# EAGLE board CT_schematic (EAGLE 7.6.0)

Size 100 x 80 mm. Coordinates in mm from the lower left corner, seen from the top.
Outline: 0,0 100,0 100,80 0,80 0,0
Copper layers (1*16): Top 0.035mm / dielectric 1.5mm / Bottom 0.035mm
Design rules "default": minimum track width 10mil, minimum drill 24mil, track to track 8mil, track to pad 8mil, pad to pad 8mil, via to via 8mil, smd to smd 8mil, copper to edge 40mil, drill to drill 8mil, minimum pad ring 10mil, minimum via ring 8mil, stop-mask expansion 4mil, vias tented up to drill 0mil, thermal gap 10mil

## Footprints (pad centres in the part's own frame; a part is rotated, then mirrored left to right if it is on the bottom)
C0603 = smd 0.8 x 0.8: 1 -0.762,0; 2 0.762,0
C0402 = smd 0.5 x 0.5: 1 -0.508,0; 2 0.508,0
C0805 = smd 1.2 x 1.3: 1 -1.016,0; 2 1.016,0
C1210 = smd 1.2 x 2.5: 1 -1.524,0; 2 1.524,0
EXV-9H = smd 3.505 x 1.676: 1 -2.857,0; 2 2.857,0
L0603 = smd 0.8 x 0.8: 1 -0.762,0; 2 0.762,0
R0603 = smd 0.8 x 0.8: 1 -0.762,0; 2 0.762,0
PJ-037B_PACKAGE = drill 3.7 square: 1 12,0 | drill 3.2 square: 2 6,0
LQFP176 = smd 0.3 x 1.2: 1 -10.75,-12.75; 2 -10.25,-12.75; 3 -9.75,-12.75; 4 -9.25,-12.75; 5 -8.75,-12.75; 6 -8.25,-12.75; 7 -7.75,-12.75; 8 -7.25,-12.75; 9 -6.75,-12.75; 10 -6.25,-12.75; 11 -5.75,-12.75; 12 -5.25,-12.75; 13 -4.75,-12.75; 14 -4.25,-12.75; 15 -3.75,-12.75; 16 -3.25,-12.75; 17 -2.75,-12.75; 18 -2.25,-12.75; 19 -1.75,-12.75; 20 -1.25,-12.75; 21 -0.75,-12.75; 22 -0.25,-12.75; 23 0.25,-12.75; 24 0.75,-12.75; 25 1.25,-12.75; 26 1.75,-12.75; 27 2.25,-12.75; 28 2.75,-12.75; 29 3.25,-12.75; 30 3.75,-12.75; 31 4.25,-12.75; 32 4.75,-12.75; 33 5.25,-12.75; 34 5.75,-12.75; 35 6.25,-12.75; 36 6.75,-12.75; 37 7.25,-12.75; 38 7.75,-12.75; 39 8.25,-12.75; 40 8.75,-12.75; 41 9.25,-12.75; 42 9.75,-12.75; 43 10.25,-12.75; 44 10.75,-12.75; 89 10.75,12.75; 90 10.25,12.75; 91 9.75,12.75; 92 9.25,12.75; 93 8.75,12.75; 94 8.25,12.75; 95 7.75,12.75; 96 7.25,12.75; 97 6.75,12.75; 98 6.25,12.75; 99 5.75,12.75; 100 5.25,12.75; 101 4.75,12.75; 102 4.25,12.75; 103 3.75,12.75; 104 3.25,12.75; 105 2.75,12.75; 106 2.25,12.75; 107 1.75,12.75; 108 1.25,12.75; 109 0.75,12.75; 110 0.25,12.75; 111 -0.25,12.75; 112 -0.75,12.75; 113 -1.25,12.75; 114 -1.75,12.75; 115 -2.25,12.75; 116 -2.75,12.75; 117 -3.25,12.75; 118 -3.75,12.75; 119 -4.25,12.75; 120 -4.75,12.75; 121 -5.25,12.75; 122 -5.75,12.75; 123 -6.25,12.75; 124 -6.75,12.75; 125 -7.25,12.75; 126 -7.75,12.75; 127 -8.25,12.75; 128 -8.75,12.75; 129 -9.25,12.75; 130 -9.75,12.75; 131 -10.25,12.75; 132 -10.75,12.75 | smd 1.2 x 0.3: 45 12.75,-10.75; 46 12.75,-10.25; 47 12.75,-9.75; 48 12.75,-9.25; 49 12.75,-8.75; 50 12.75,-8.25; 51 12.75,-7.75; 52 12.75,-7.25; 53 12.75,-6.75; 54 12.75,-6.25; 55 12.75,-5.75; 56 12.75,-5.25; 57 12.75,-4.75; 58 12.75,-4.25; 59 12.75,-3.75; 60 12.75,-3.25; 61 12.75,-2.75; 62 12.75,-2.25; 63 12.75,-1.75; 64 12.75,-1.25; 65 12.75,-0.75; 66 12.75,-0.25; 67 12.75,0.25; 68 12.75,0.75; 69 12.75,1.25; 70 12.75,1.75; 71 12.75,2.25; 72 12.75,2.75; 73 12.75,3.25; 74 12.75,3.75; 75 12.75,4.25; 76 12.75,4.75; 77 12.75,5.25; 78 12.75,5.75; 79 12.75,6.25; 80 12.75,6.75; 81 12.75,7.25; 82 12.75,7.75; 83 12.75,8.25; 84 12.75,8.75; 85 12.75,9.25; 86 12.75,9.75; 87 12.75,10.25; 88 12.75,10.75; 133 -12.75,10.75; 134 -12.75,10.25; 135 -12.75,9.75; 136 -12.75,9.25; 137 -12.75,8.75; 138 -12.75,8.25; 139 -12.75,7.75; 140 -12.75,7.25; 141 -12.75,6.75; 142 -12.75,6.25; 143 -12.75,5.75; 144 -12.75,5.25; 145 -12.75,4.75; 146 -12.75,4.25; 147 -12.75,3.75; 148 -12.75,3.25; 149 -12.75,2.75; 150 -12.75,2.25; 151 -12.75,1.75; 152 -12.75,1.25; 153 -12.75,0.75; 154 -12.75,0.25; 155 -12.75,-0.25; 156 -12.75,-0.75; 157 -12.75,-1.25; 158 -12.75,-1.75; 159 -12.75,-2.25; 160 -12.75,-2.75; 161 -12.75,-3.25; 162 -12.75,-3.75; 163 -12.75,-4.25; 164 -12.75,-4.75; 165 -12.75,-5.25; 166 -12.75,-5.75; 167 -12.75,-6.25; 168 -12.75,-6.75; 169 -12.75,-7.25; 170 -12.75,-7.75; 171 -12.75,-8.25; 172 -12.75,-8.75; 173 -12.75,-9.25; 174 -12.75,-9.75; 175 -12.75,-10.25; 176 -12.75,-10.75
TST-110-05-T-D-RA = drill 1 pad 1.7 square: 1 0,0 | drill 1 pad 1.7: 2 0,2.54; 3 2.54,0; 4 2.54,2.54; 5 5.08,0; 6 5.08,2.54; 7 7.62,0; 8 7.62,2.54; 9 10.16,0; 10 10.16,2.54; 11 12.7,0; 12 12.7,2.54; 13 15.24,0; 14 15.24,2.54; 15 17.78,0; 16 17.78,2.54; 17 20.32,0; 18 20.32,2.54; 19 22.86,0; 20 22.86,2.54
QFN-32 = smd 0.6 x 0.3: 1 -2.3,1.75; 2 -2.3,1.25; 3 -2.3,0.75; 4 -2.3,0.25; 5 -2.3,-0.25; 6 -2.3,-0.75; 7 -2.3,-1.25; 8 -2.3,-1.75; 17 2.3,-1.75; 18 2.3,-1.25; 19 2.3,-0.75; 20 2.3,-0.25; 21 2.3,0.25; 22 2.3,0.75; 23 2.3,1.25; 24 2.3,1.75 | smd 0.3 x 0.6: 9 -1.75,-2.3; 10 -1.25,-2.3; 11 -0.75,-2.3; 12 -0.25,-2.3; 13 0.25,-2.3; 14 0.75,-2.3; 15 1.25,-2.3; 16 1.75,-2.3; 25 1.75,2.3; 26 1.25,2.3; 27 0.75,2.3; 28 0.25,2.3; 29 -0.25,2.3; 30 -0.75,2.3; 31 -1.25,2.3; 32 -1.75,2.3 | smd 3.2 x 3.2: EXP 0,0
7498011122R = smd 0.71 x 2.29: 1 -3.545,-3.18; 2 -2.525,-3.18; 3 -1.505,-3.18; 4 -0.485,-3.18; 5 0.535,-3.18; 6 1.555,-3.18; 8 3.595,-3.18; 9 5.635,-3.18; 10 6.655,-3.18; 11 -6.605,-3.18; 12 -5.585,-3.18 | smd 1.4 x 2.54: 13 -8.51,10.2; 14 8.51,10.2 | hole 1.4: -3.5,0; 3.5,0
TDFN-8/6MM = smd 0.3 x 0.75: 1 0,0; 2 0.5,0; 3 1,0; 4 1.5,0; 5 1.5,3; 6 1,3; 7 0.5,3; 8 0,3
SOIC-8 = smd 1.6 x 0.6: 1 -2.7,1.905 | smd 1.55 x 0.6: 2 -2.7,0.635; 3 -2.7,-0.635; 4 -2.7,-1.905; 5 2.7,-1.905; 6 2.7,-0.635; 7 2.7,0.635; 8 2.7,1.905
182-009-MALE = drill 1.194 pad 1.524 octagon: 1 -5.537,10.923; 2 -2.769,10.923; 3 0,10.923; 4 2.769,10.923; 5 5.537,10.923; 6 -4.153,8.08; 7 -1.384,8.08; 8 1.384,8.08; 9 4.153,8.08 | hole 3.048: -12.446,9.501; 12.446,9.501
FCI_10118193-0001LF = smd 0.4 x 1.35: 1 -1.3,2.675; 2 -0.65,2.675; 3 0,2.675; 4 0.65,2.675; 5 1.3,2.675 | smd 1.6 x 1.4: 6 -3.2,2.45; 7 3.2,2.45 | smd 1.9 x 1.9: 8 -1.2,0; 9 1.2,0 | hole 0.5: -3.3,0; 3.3,0
SOT143B = smd 1 x 0.7: 1 -0.75,-1 | smd 0.6 x 0.7: 2 0.95,-1; 3 0.95,1; 4 -0.95,1
QFN-28 = smd 0.813 x 0.305: 1 -2.451,1.5; 2 -2.451,1; 3 -2.451,0.5; 4 -2.451,0; 5 -2.451,-0.5; 6 -2.451,-1; 7 -2.451,-1.5; 15 2.451,-1.5; 16 2.451,-1; 17 2.451,-0.5; 18 2.451,0; 19 2.451,0.5; 20 2.451,1; 21 2.451,1.5 | smd 0.305 x 0.813: 8 -1.5,-2.451; 9 -1,-2.451; 10 -0.5,-2.451; 11 0,-2.451; 12 0.5,-2.451; 13 1,-2.451; 14 1.5,-2.451; 22 1.5,2.451; 23 1,2.451; 24 0.5,2.451; 25 0,2.451; 26 -0.5,2.451; 27 -1,2.451; 28 -1.5,2.451 | smd 3.607 x 3.607: 29 0,0
SJ-43515TS-SMT-TR = smd 2.2 x 3: 1 0.6,-7.4; 4 3.4,-7.4 | smd 3 x 3: 2 12.8,-7.4; 5 17,-3 | smd 2 x 3: 3 5.3,0; 6 2.5,0 | drill 1.8: P$7 4.5,-3.69; P$8 11.54,-3.69
ABS07-32.768KHZ-7-T = smd 1.1 x 2.4: 1 -2.5,0; 2 0,0
ABLS-25.000MHZ-B2F-T = smd 5.6 x 2.8: 1 -3.81,0; 2 5.69,0
ABLS-12.288MHZ-B4-T = smd 5.6 x 2.8: 1 -3.81,0; 2 5.69,0
ASFL1 = smd 1.7 x 1.5: 1 -1.27,-1.1; 2 1.27,-1.1; 3 1.27,1.1; 4 -1.27,1.1
WSON-8 = smd 0.3 x 0.6: 1 -0.75,0; 2 0.05,0; 3 0.85,0; 4 1.65,0; 5 1.65,3.8; 6 0.85,3.8; 7 0.05,3.8; 8 -0.75,3.8 | smd 3 x 2.6: PAD 0.45,1.9
SON-6 = smd 0.55 x 0.3: 1 -0.355,0.5 | smd 0.52 x 0.3: 2 -0.37,0; 3 -0.37,-0.5; 4 0.37,-0.5; 5 0.37,0; 6 0.37,0.5
SW_4-1437565-2 = smd 1.4 x 2.1: 1 -2.23,4.55; 2 -2.23,-4.55; 3 2.23,4.55; 4 2.23,-4.55
LGM67K-G1J2-24-Z = smd 0.8 x 1.4: A -2,0; C 0,0
NC7SZ125M5X = smd 1.3 x 0.7: 1 -1.3,0.95; 2 -1.3,0; 3 -1.3,-0.95; 4 1.3,-0.95; 5 1.3,0.95

## Placement (x,y rotation side)
C1  1e-06  [C0603]  -22.86,87.63 0 top  (outside the outline)
C2  1e-07  [C0603]  -26.67,87.63 0 top  (outside the outline)
C3  1e-07  [C0603]  -30.48,87.63 0 top  (outside the outline)
C4  1e-07  [C0603]  -34.29,87.63 0 top  (outside the outline)
C5  1e-07  [C0603]  -38.1,87.63 0 top  (outside the outline)
C6  1e-07  [C0603]  -41.91,87.63 0 top  (outside the outline)
C7  1e-07  [C0603]  -45.72,87.63 0 top  (outside the outline)
C8  1e-07  [C0603]  -49.53,87.63 0 top  (outside the outline)
C9  1e-07  [C0603]  -53.34,87.63 0 top  (outside the outline)
C10  1e-07  [C0603]  -57.15,87.63 0 top  (outside the outline)
C11  1e-07  [C0603]  -60.96,87.63 0 top  (outside the outline)
C12  1e-07  [C0603]  -64.77,87.63 0 top  (outside the outline)
C13  1e-07  [C0603]  -68.58,87.63 0 top  (outside the outline)
C14  1e-07  [C0603]  -72.39,87.63 0 top  (outside the outline)
C15  1e-07  [C0603]  -76.2,87.63 0 top  (outside the outline)
C16  1e-07  [C0603]  -80.01,87.63 0 top  (outside the outline)
C17  1e-07  [C0603]  -83.82,87.63 0 top  (outside the outline)
C18  4.7e-06  [C0603]  -95.25,82.55 0 top  (outside the outline)
C19  1e-08  [C0603]  -87.63,87.63 0 top  (outside the outline)
C20  1e-06  [C0603]  -91.44,87.63 0 top  (outside the outline)
C21  2.2e-06  [C0603]  -99.06,82.55 0 top  (outside the outline)
C22  2.2e-06  [C0603]  -15.24,87.63 0 top  (outside the outline)
C23  1e-11  [C0402]  -50.8,97.79 0 top  (outside the outline)
C24  1e-11  [C0402]  -54.61,97.79 0 top  (outside the outline)
C25  1e-06  [C0603]  -95.25,87.63 0 top  (outside the outline)
C26  1e-07  [C0402]  -58.42,97.79 0 top  (outside the outline)
C27  1e-07  [C0402]  -62.23,97.79 0 top  (outside the outline)
C28  1e-07  [C0402]  -66.04,97.79 0 top  (outside the outline)
C29  2.2e-06  [C0603]  -19.05,87.63 0 top  (outside the outline)
C30  1e-07  [C0402]  -69.85,97.79 0 top  (outside the outline)
C31  1e-07  [C0402]  -73.66,97.79 0 top  (outside the outline)
C32  1e-05  [C0805]  -81.28,74.93 0 top  (outside the outline)
C33  1e-07  [C0402]  -77.47,97.79 0 top  (outside the outline)
C34  2.2e-11  [C0402]  -35.56,97.79 0 top  (outside the outline)
C35  2.2e-11  [C0402]  -39.37,97.79 0 top  (outside the outline)
C36  1e-08  [C0402]  -81.28,97.79 0 top  (outside the outline)
C37  1e-07  [C0402]  -85.09,97.79 0 top  (outside the outline)
C38  2.2e-05  [C1210]  -38.1,76.2 0 top  (outside the outline)
C39  2.2e-05  [C1210]  -44.45,76.2 0 top  (outside the outline)
C40  1e-09  [C0402]  -88.9,97.79 0 top  (outside the outline)
C41  1e-09  [C0402]  -92.71,97.79 0 top  (outside the outline)
C42  1e-07  [C0402]  -96.52,97.79 0 top  (outside the outline)
C43  1e-07  [C0402]  -15.24,102.87 0 top  (outside the outline)
C44  1e-07  [C0402]  -19.05,102.87 0 top  (outside the outline)
C45  1e-07  [C0402]  -22.86,102.87 0 top  (outside the outline)
C46  1e-07  [C0402]  -26.67,102.87 0 top  (outside the outline)
C47  1e-05  [C0805]  -86.36,74.93 0 top  (outside the outline)
C48  1e-05  [C0805]  -91.44,74.93 0 top  (outside the outline)
C49  1e-05  [C0805]  -96.52,74.93 0 top  (outside the outline)
C50  1e-05  [C0805]  -15.24,82.55 0 top  (outside the outline)
C51  1e-05  [C0805]  -20.32,82.55 0 top  (outside the outline)
C52  2.2e-11  [C0402]  -43.18,97.79 0 top  (outside the outline)
C53  2.2e-11  [C0402]  -46.99,97.79 0 top  (outside the outline)
C54  1e-08  [C0402]  -30.48,102.87 0 top  (outside the outline)
C55  1e-08  [C0402]  -34.29,102.87 0 top  (outside the outline)
C56  1e-08  [C0402]  -38.1,102.87 0 top  (outside the outline)
C57  1e-05  [C1210]  -50.8,76.2 0 top  (outside the outline)
C58  1e-05  [C1210]  -57.15,76.2 0 top  (outside the outline)
C59  1e-07  [C0402]  -41.91,102.87 0 top  (outside the outline)
C60  0.0001  [EXV-9H]  -17.78,68.58 0 top  (outside the outline)
C61  0.0001  [EXV-9H]  -29.21,68.58 0 top  (outside the outline)
C62  1e-08  [C0402]  -45.72,102.87 0 top  (outside the outline)
C63  1e-08  [C0402]  -49.53,102.87 0 top  (outside the outline)
C64  1e-08  [C0402]  -53.34,102.87 0 top  (outside the outline)
F1  240.0  [L0603]  -99.06,87.63 0 top  (outside the outline)
I1  97.0  [R0603]  -15.24,92.71 0 top  (outside the outline)
J1  PJ-037B  [PJ-037B_PACKAGE]  -83.82,35.56 0 top  (outside the outline)
R2  1000.0  [R0603]  -19.05,92.71 0 top  (outside the outline)
R7  4700.0  [R0603]  -22.86,92.71 0 top  (outside the outline)
R8  4700.0  [R0603]  -26.67,92.71 0 top  (outside the outline)
R9  2200.0  [R0603]  -30.48,92.71 0 top  (outside the outline)
R11  2200.0  [R0603]  -34.29,92.71 0 top  (outside the outline)
R13  2200.0  [R0603]  -38.1,92.71 0 top  (outside the outline)
R15  2200.0  [R0603]  -41.91,92.71 0 top  (outside the outline)
R17  10000.0  [R0603]  -45.72,82.55 0 top  (outside the outline)
R18  10000.0  [R0603]  -50.8,82.55 0 top  (outside the outline)
R19  10000.0  [R0603]  -55.88,82.55 0 top  (outside the outline)
R20  10000.0  [R0603]  -60.96,82.55 0 top  (outside the outline)
R21  10000.0  [R0603]  -66.04,82.55 0 top  (outside the outline)
R22  0.1  [R0603]  -45.72,92.71 0 top  (outside the outline)
R23  0.1  [R0603]  -49.53,92.71 0 top  (outside the outline)
R24  200.0  [R0603]  -53.34,92.71 0 top  (outside the outline)
R25  220.0  [R0603]  -57.15,92.71 0 top  (outside the outline)
R26  6490.0  [R0603]  -60.96,92.71 0 top  (outside the outline)
R27  4700.0  [R0603]  -64.77,92.71 0 top  (outside the outline)
R28  4700.0  [R0603]  -68.58,92.71 0 top  (outside the outline)
R29  4700.0  [R0603]  -72.39,92.71 0 top  (outside the outline)
R30  4700.0  [R0603]  -76.2,92.71 0 top  (outside the outline)
R31  1000.0  [R0603]  -80.01,92.71 0 top  (outside the outline)
R32  4700.0  [R0603]  -83.82,92.71 0 top  (outside the outline)
R33  1000.0  [R0603]  -87.63,92.71 0 top  (outside the outline)
R34  1000.0  [R0603]  -91.44,92.71 0 top  (outside the outline)
R35  1000.0  [R0603]  -95.25,92.71 0 top  (outside the outline)
R36  4700.0  [R0603]  -99.06,92.71 0 top  (outside the outline)
R37  120.0  [R0603]  -15.24,97.79 0 top  (outside the outline)
R38  470000.0  [R0603]  -25.4,82.55 0 top  (outside the outline)
R39  47000.0  [R0603]  -71.12,82.55 0 top  (outside the outline)
R40  47000.0  [R0603]  -76.2,82.55 0 top  (outside the outline)
R41  47000.0  [R0603]  -81.28,82.55 0 top  (outside the outline)
R42  680.0  [R0603]  -19.05,97.79 0 top  (outside the outline)
R43  100000.0  [R0603]  -30.48,82.55 0 top  (outside the outline)
R44  2231.0  [R0603]  -22.86,97.79 0 top  (outside the outline)
R45  1000.0  [R0603]  -26.67,97.79 0 top  (outside the outline)
R46  10000.0  [R0603]  -86.36,82.55 0 top  (outside the outline)
R47  10000.0  [R0603]  -91.44,82.55 0 top  (outside the outline)
R48  9100.0  [R0603]  -30.48,97.79 0 top  (outside the outline)
R49  680000.0  [R0603]  -35.56,82.55 0 top  (outside the outline)
R50  120000.0  [R0603]  -40.64,82.55 0 top  (outside the outline)
U1  STM32F437IIT6  [LQFP176]  -45.72,13.97 0 top  (outside the outline)
U2  TST-110-05-T-D-RA  [TST-110-05-T-D-RA]  -91.44,57.15 0 top  (outside the outline)
U3  KSZ8081RNBIA-TR  [QFN-32]  -44.45,48.26 0 top  (outside the outline)
U4  7498011122R  [7498011122R]  -22.86,7.62 0 top  (outside the outline)
U5  24AA08T-I/MNY  [TDFN-8/6MM]  -60.96,46.99 0 top  (outside the outline)
U6  SN65HVD230D  [SOIC-8]  -73.66,48.26 0 top  (outside the outline)
U7  182-009-113R531  [182-009-MALE]  -82.55,6.35 0 top  (outside the outline)
U8  10118193-0001LF  [FCI_10118193-0001LF]  -52.07,59.69 0 top  (outside the outline)
U9  prtr5v0u2ax  [SOT143B]  -66.04,102.87 0 top  (outside the outline)
U10  WM8731CLSEFL  [QFN-28]  -30.48,76.2 0 top  (outside the outline)
U11  SJ-43515TS-SMT-TR  [SJ-43515TS-SMT-TR]  -39.37,38.1 0 top  (outside the outline)
U12  SJ-43515TS-SMT-TR  [SJ-43515TS-SMT-TR]  -67.31,38.1 0 top  (outside the outline)
U13  ABS07-32.768KHZ-7-T  [ABS07-32.768KHZ-7-T]  -91.44,68.58 0 top  (outside the outline)
U14  ABLS-25.000MHZ-B2F-T  [ABLS-25.000MHZ-B2F-T]  -48.26,68.58 0 top  (outside the outline)
U15  ABLS-12.288MHZ-B4-T  [ABLS-12.288MHZ-B4-T]  -68.58,68.58 0 top  (outside the outline)
U16  ASFL1-25MHZ-NCS  [ASFL1]  -26.67,59.69 0 top  (outside the outline)
U17  ASFL1-50MHZ-NCS  [ASFL1]  -43.18,59.69 0 top  (outside the outline)
U18  LP3878SDX-ADJ/NOPB  [WSON-8]  -95.25,45.72 0 top  (outside the outline)
U19  TPS3895ADRYR  [SON-6]  -69.85,101.6 0 top  (outside the outline)
U20  4-1437565-2  [SW_4-1437565-2]  -27.94,49.53 0 top  (outside the outline)
U21  Q65110A2395  [LGM67K-G1J2-24-Z]  -17.78,76.2 0 top  (outside the outline)
U22  nc7sz125m5x  [NC7SZ125M5X]  -62.23,74.93 0 top  (outside the outline)
U23  nc7sz125m5x  [NC7SZ125M5X]  -68.58,74.93 0 top  (outside the outline)
U24  nc7sz125m5x  [NC7SZ125M5X]  -74.93,74.93 0 top  (outside the outline)

## Library data of the parts
C1-C64 F1 I1 J1 R2 R7-R9 R11 R13 R15 R17-R50 U1-U24 = circuit_tree

## Nets
CLK_CRYSTAL_U1_9: C23.1 U1.9 U13.1
CLK_CRYSTAL_U1_10: C24.1 U1.10 U13.2
CLK_CRYSTAL_U3_8: C34.1 U3.8 U14.2
CLK_CRYSTAL_U3_9: C35.1 U3.9 U14.1
CLK_CRYSTAL_U10_1: C52.1 U10.1 U15.1
CLK_CRYSTAL_U10_2: C53.1 U10.2 U15.2
CLK_U1_29: U1.29 U16.3
CLK_U1_41: U1.41 U17.3
GND: C1.2 C2.2 C3.2 C4.2 C5.2 C6.2 C7.2 C8.2 C9.2 C10.2 C11.2 C12.2 C13.2 C14.2 C15.2 C16.2 C17.2 C18.2 C19.2 C20.2 C21.2 C22.2 C23.2 C24.2 C25.2 C26.2 C27.2 C28.2 C29.2 C30.2 C31.2 C32.2 C33.2 C34.2 C35.2 C36.2 C37.2 C41.2 C42.2 C43.2 C44.2 C45.2 C46.2 C47.2 C48.2 C49.2 C50.2 C51.2 C52.2 C53.2 C54.2 C55.2 C56.2 C57.2 C58.2 C59.2 C60.2 C61.2 C62.2 C63.2 C64.2 J1.2 R2.2 R20.2 R22.2 R23.2 R26.2 R28.2 R31.2 R33.2 R34.2 R35.2 R38.2 R39.2 R40.2 R41.2 R45.2 R48.2 R50.2 U1.14 U1.22 U1.37 U1.61 U1.71 U1.90 U1.102 U1.113 U1.122 U1.126 U1.135 U1.148 U1.158 U2.4 U2.6 U2.8 U2.10 U2.12 U2.14 U2.16 U2.18 U2.20 U3.1 U3.EXP U4.1 U4.10 U5.4 U5.7 U6.2 U7.5 U8.5 U8.6 U8.7 U8.8 U8.9 U9.1 U10.4 U10.15 U10.19 U10.25 U10.26 U10.29 U11.1 U12.1 U16.2 U17.2 U18.3 U18.PAD U19.2 U21.C U22.2 U22.3 U23.1 U23.3 U24.1 U24.3
NET_U1_31: R8.1 U1.31 U24.4
NET_U1_33: R13.1 U1.33 U3.12
NET_U1_39: C19.1 C20.1 F1.1 U1.38 U1.39
NET_U1_42: R15.1 U1.42 U3.11
NET_U1_48: R20.1 U1.48
NET_U1_58: R19.1 U1.58
NET_U1_81: C21.1 U1.81
NET_U1_125: C22.1 U1.125
NET_U1_164: R9.1 U1.164 U5.6
NET_U1_165: R11.1 U1.165 U5.5
NET_U1_166: R18.1 U1.166
NET_U1_171: R17.1 U1.171
NET_U1_175: U21.A
NET_U1_176: U20.3 U20.4
NET_U3_2: C29.1 C30.1 U3.2
NET_U3_3: C31.1 I1.1 U3.3
NET_U3_10: R26.1 U3.10
NET_U3_13: R29.1 U3.13
NET_U3_14: R30.1 U3.14
NET_U3_19: R28.1 U3.19
NET_U3_20: R34.1 U3.20
NET_U3_21: R27.1 U3.21
NET_U3_28: R32.1 U3.28
NET_U3_29: R33.1 U3.29
NET_U3_31: R35.1 U3.31
NET_U3_32: R7.1 U3.32 U23.4
NET_U4_1: U3.7 U4.1
NET_U4_2: C27.1 U4.2
NET_U4_3: U3.6 U4.3
NET_U4_4: U3.5 U4.4
NET_U4_5: C28.1 U4.5
NET_U4_6: U3.4 U4.6
NET_U4_8: R23.1 U4.8
NET_U4_9: R24.1 U4.9
NET_U4_12: R25.1 U4.12
NET_U4_13: R22.1 U4.13 U4.14
NET_U4_30: R24.2
NET_U4_31: R25.2
NET_U6_6: R37.2 U6.6
NET_U6_8: R38.1 U6.8
NET_U7_2: R37.2 U6.6 U7.2
NET_U7_3: R37.1 U6.7 U7.3
NET_U10_9: U10.9
NET_U10_20: C46.1 C51.1 U10.20
NET_U11_2: C39.1 R40.1 U11.2
NET_U11_5: C38.1 R39.1 U11.5
NET_U11_13: C38.2
NET_U11_14: C39.2
NET_U12_5: C40.1 C41.1 R41.1 R42.1 U12.5
NET_U12_21: R42.2
NET_U12_22: C40.2
NET_U18_1: C56.1 U18.1
NET_U18_6: R44.2 R45.1 U18.6
NET_U18_8: R43.1 U18.8
NET_U19_1: R47.1 R48.1 U19.1
NET_U19_3: R49.2 R50.1 U19.3
NET_U19_4: R46.1 U19.4 U22.4 U23.2 U24.2
NET_U20_1: R2.1 U20.1 U20.2
PROC_CAN1_RX: U1.11 U6.4
PROC_CAN1_TX: U1.128 U6.1
PROC_ETH_CRS_DV: U1.53 U3.18
PROC_ETH_RXD0: R36.1 U1.54 U3.16
PROC_ETH_RXD1: R31.1 U1.55 U3.15
PROC_ETH_TX_EN: U1.80 U3.23
PROC_ETH_TXD0: U1.92 U3.24
PROC_ETH_TXD1: U1.93 U3.25
PROC_I2S2_CK: U1.79 U10.7
PROC_I2S2_EXT_SD: U1.34 U10.10
PROC_I2S2_SD: U1.35 U10.8
PROC_I2S2_WS: U1.131 U10.9 U10.11
PROC_SYS_JTCK_SWCLK: U1.137 U2.9
PROC_SYS_JTDO_SWO: U1.161 U2.13
PROC_SYS_JTMS_SWDIO: U1.124 U2.7
PROC_USB_OTG_FS_DM: U1.122 U8.2 U9.3
PROC_USB_OTG_FS_DP: U1.123 U8.3 U9.2
PROC_USB_OTG_FS_VBUS: C25.1 U1.120 U8.1 U9.4
RST_OUT_U2_SRESET_B: R21.1 U2.15 U22.1
VCC_S1_12V1: C57.1 C60.1 C61.1 J1.1 R43.2 U18.4
VCC_TIER1_3V3: C1.1 C2.1 C3.1 C4.1 C5.1 C6.1 C7.1 C8.1 C9.1 C10.1 C11.1 C12.1 C13.1 C14.1 C15.1 C16.1 C17.1 C18.1 C26.1 C32.1 C33.1 C36.1 C37.1 C42.1 C43.1 C44.1 C45.1 C47.1 C48.1 C49.1 C50.1 C54.1 C55.1 C58.1 C59.1 C62.1 C63.1 C64.1 F1.2 I1.2 R7.2 R8.2 R9.2 R11.2 R13.2 R15.2 R17.2 R18.2 R19.2 R21.2 R27.2 R29.2 R30.2 R32.2 R36.2 R44.1 R46.2 R47.2 R49.1 U1.6 U1.15 U1.23 U1.36 U1.49 U1.62 U1.72 U1.82 U1.91 U1.103 U1.114 U1.127 U1.136 U1.149 U1.159 U1.172 U2.1 U3.17 U5.8 U6.3 U10.3 U10.5 U10.12 U10.18 U16.4 U17.4 U18.5 U19.6 U22.5 U23.5 U24.5

## Tracks (layer width: path | path; a pad name or v marks a point on that pad's centre or on a via)
CLK_CRYSTAL_U1_9  (2 unrouted)
CLK_CRYSTAL_U1_10  (2 unrouted)
CLK_CRYSTAL_U3_8  (2 unrouted)
CLK_CRYSTAL_U3_9  (2 unrouted)
CLK_CRYSTAL_U10_1  (2 unrouted)
CLK_CRYSTAL_U10_2  (2 unrouted)
CLK_U1_29  (1 unrouted)
CLK_U1_41  (1 unrouted)
GND  (134 unrouted)
NET_U1_31  (2 unrouted)
NET_U1_33  (2 unrouted)
NET_U1_39  (4 unrouted)
NET_U1_42  (2 unrouted)
NET_U1_48  (1 unrouted)
NET_U1_58  (1 unrouted)
NET_U1_81  (1 unrouted)
NET_U1_125  (1 unrouted)
NET_U1_164  (2 unrouted)
NET_U1_165  (2 unrouted)
NET_U1_166  (1 unrouted)
NET_U1_171  (1 unrouted)
NET_U1_176  (1 unrouted)
NET_U3_2  (2 unrouted)
NET_U3_3  (2 unrouted)
NET_U3_10  (1 unrouted)
NET_U3_13  (1 unrouted)
NET_U3_14  (1 unrouted)
NET_U3_19  (1 unrouted)
NET_U3_20  (1 unrouted)
NET_U3_21  (1 unrouted)
NET_U3_28  (1 unrouted)
NET_U3_29  (1 unrouted)
NET_U3_31  (1 unrouted)
NET_U3_32  (2 unrouted)
NET_U4_1  (1 unrouted)
NET_U4_2  (1 unrouted)
NET_U4_3  (1 unrouted)
NET_U4_4  (1 unrouted)
NET_U4_5  (1 unrouted)
NET_U4_6  (1 unrouted)
NET_U4_8  (1 unrouted)
NET_U4_9  (1 unrouted)
NET_U4_12  (1 unrouted)
NET_U4_13  (2 unrouted)
NET_U6_6  (1 unrouted)
NET_U6_8  (1 unrouted)
NET_U7_2  (2 unrouted)
NET_U7_3  (2 unrouted)
NET_U10_20  (2 unrouted)
NET_U11_2  (2 unrouted)
NET_U11_5  (2 unrouted)
NET_U12_5  (4 unrouted)
NET_U18_1  (1 unrouted)
NET_U18_6  (2 unrouted)
NET_U18_8  (1 unrouted)
NET_U19_1  (2 unrouted)
NET_U19_3  (2 unrouted)
NET_U19_4  (4 unrouted)
NET_U20_1  (2 unrouted)
PROC_CAN1_RX  (1 unrouted)
PROC_CAN1_TX  (1 unrouted)
PROC_ETH_CRS_DV  (1 unrouted)
PROC_ETH_RXD0  (2 unrouted)
PROC_ETH_RXD1  (2 unrouted)
PROC_ETH_TX_EN  (1 unrouted)
PROC_ETH_TXD0  (1 unrouted)
PROC_ETH_TXD1  (1 unrouted)
PROC_I2S2_CK  (1 unrouted)
PROC_I2S2_EXT_SD  (1 unrouted)
PROC_I2S2_SD  (1 unrouted)
PROC_I2S2_WS  (2 unrouted)
PROC_SYS_JTCK_SWCLK  (1 unrouted)
PROC_SYS_JTDO_SWO  (1 unrouted)
PROC_SYS_JTMS_SWDIO  (1 unrouted)
PROC_USB_OTG_FS_DM  (2 unrouted)
PROC_USB_OTG_FS_DP  (2 unrouted)
PROC_USB_OTG_FS_VBUS  (3 unrouted)
RST_OUT_U2_SRESET_B  (2 unrouted)
VCC_S1_12V1  (5 unrouted)
VCC_TIER1_3V3  (89 unrouted)